# Altium PCB PCB1.PcbDoc
Units mm, origin at the board's own origin, x right, y up, seen from the top; angles counter-clockwise.
Board outline 27.31 x 19.94 mm, 2 copper layers (Top Layer, Bottom Layer); 10 components, 11 nets, 34 pads, 22 vias.
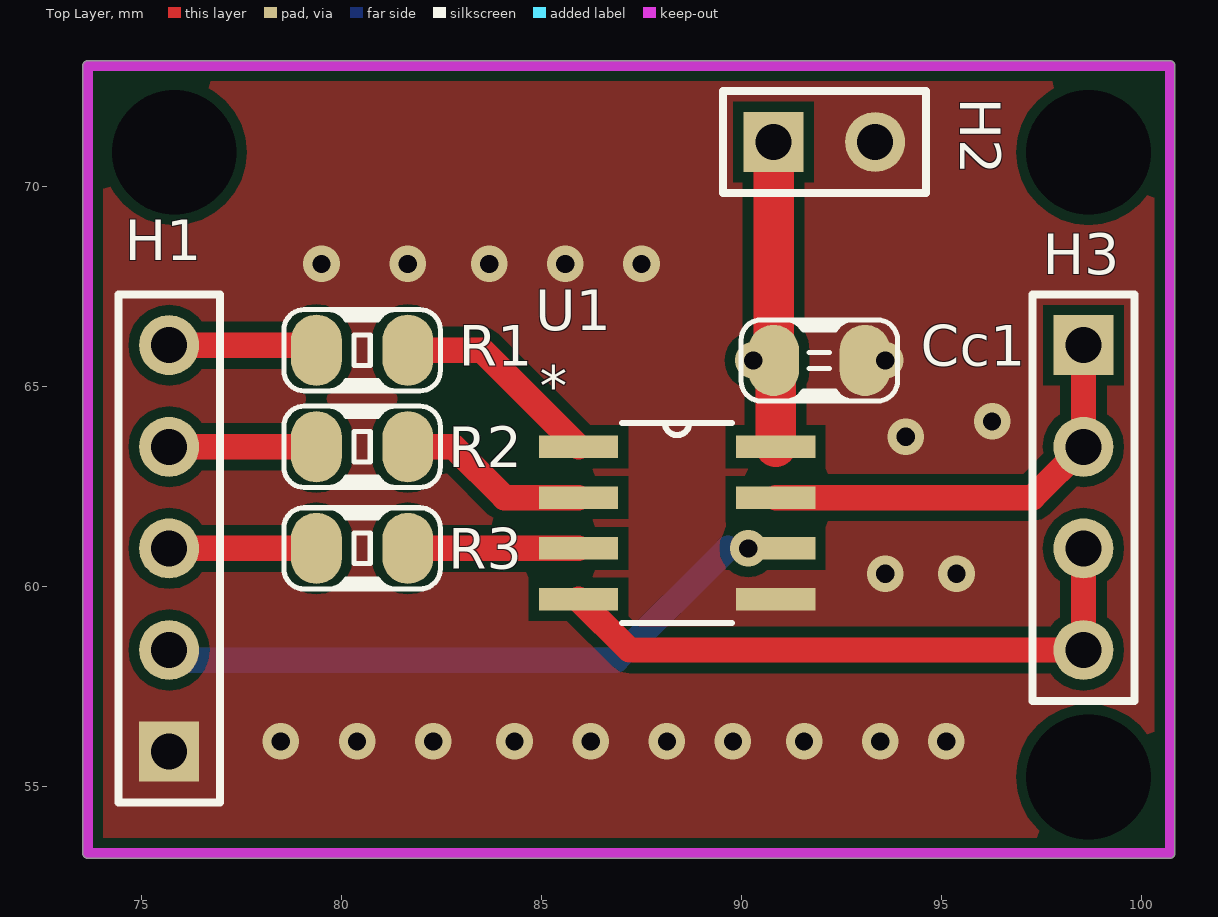
[diagram p0: Top Layer view]
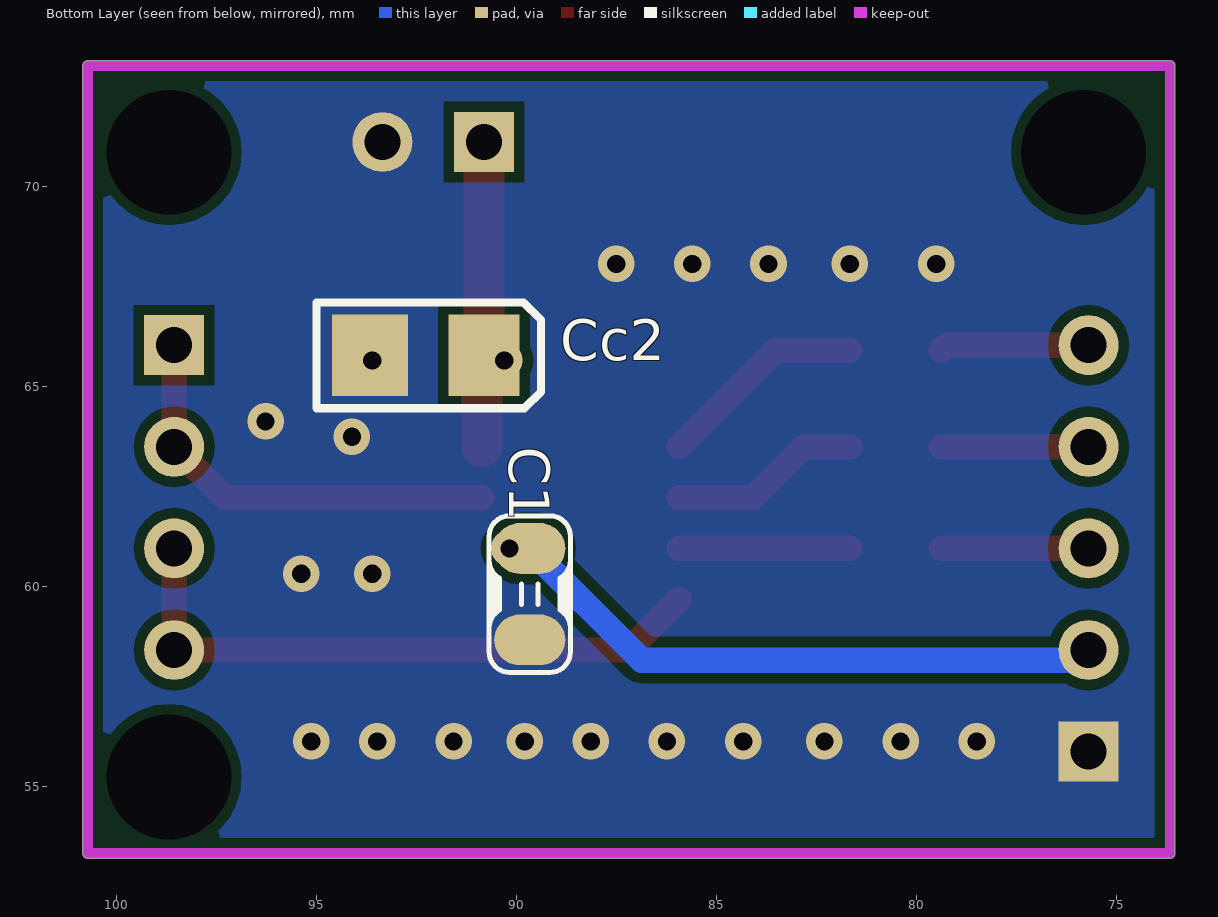
[diagram p1: Bottom Layer view, seen from below]
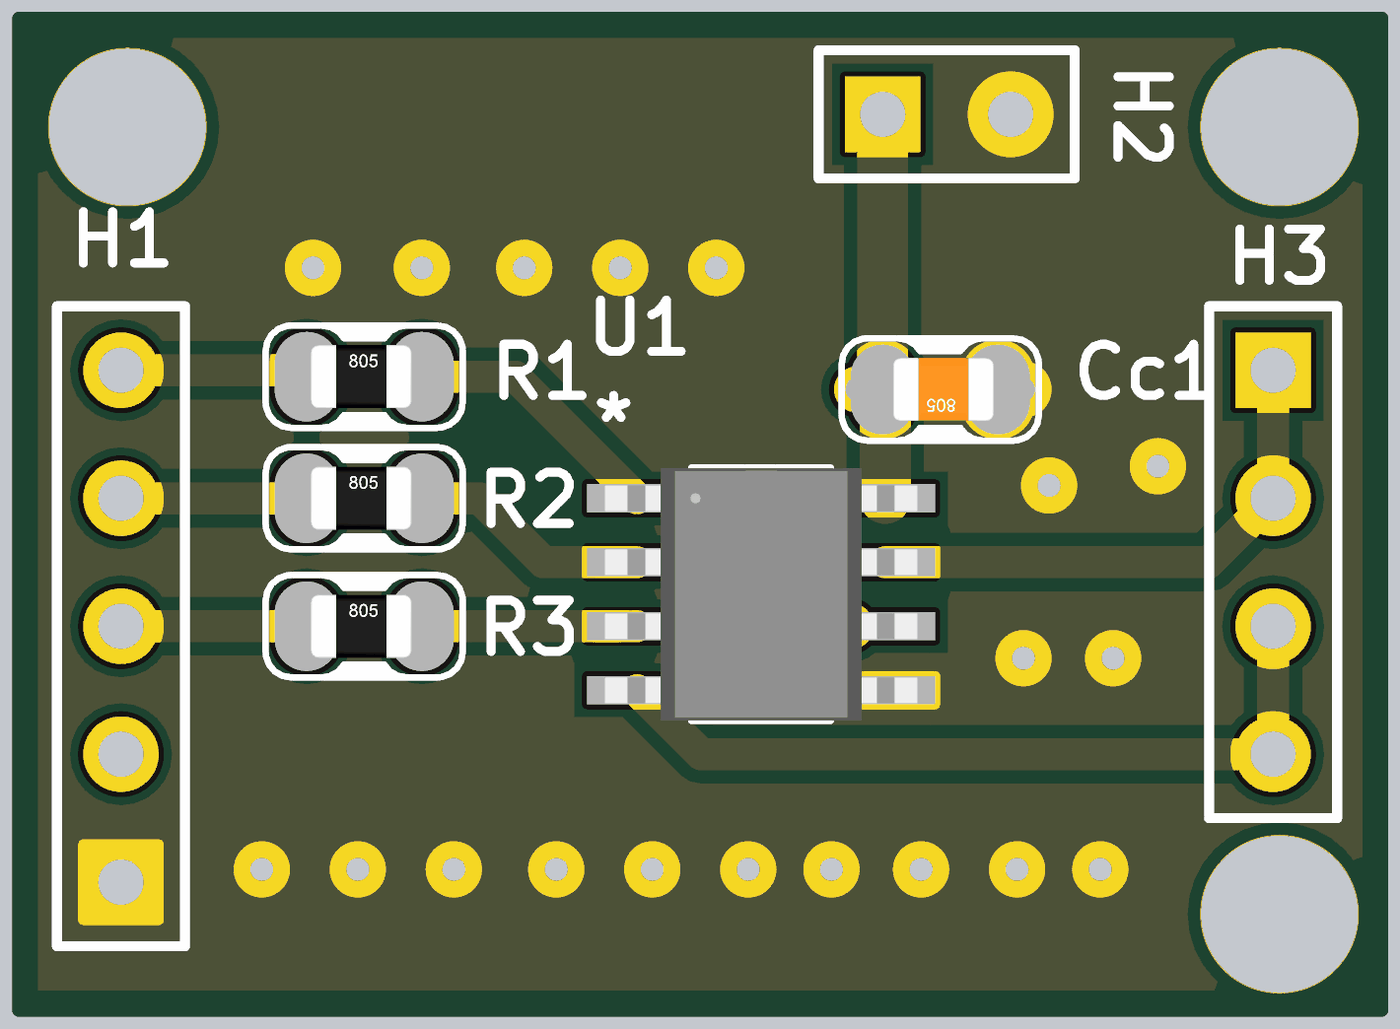
[diagram p2: 3D render of the assembled board from above, using the file's embedded part models]

## Layer stack, top to bottom
Top Solder: solder mask 0.0102, Solder Resist, Dk 3.5
Top Layer: signal copper 0.0356
Dielectric 1: dielectric 0.32, FR-4, Dk 4.8
Bottom Layer: signal copper 0.0356
Bottom Solder: solder mask 0.0102, Solder Resist, Dk 3.5

## Board outline
73.533,53.34 ccw(c73.66,53.34) 73.66,53.213 100.711,53.213 ccw(c100.711,53.34) 100.838,53.34 100.838,73.025 ccw(c100.711,73.025) 100.711,73.152 73.66,73.152 ccw(c73.66,73.025) 73.533,73.025

## Design rules (kind name [scope] priority, off if disabled: settings)
Clearance [All] p1: gap=0.254
PolygonConnect [All] p1: connectstyle=Direct reliefconductorwidth=0.254 reliefentries=4 polygonreliefangle="90 Angle" airgapwidth=0.254
RoutingVias [All] p1: holewidth=0.711 width=1.27 viastyle="Through Hole" minholewidth=0.711 minwidth=1.27 maxholewidth=0.711 maxwidth=1.27
SolderMaskExpansion [All] p1: expansion=0.102
Width [All] p1: maxlimit=2.032 minlimit=0.254 preferedwidth=0.635 minimp=50.000000 maximp=50.000000 favimp=50.000000
30 further rules are at their usual default settings.

## Components (designator, comment, footprint, x,y, rotation, side; value= is the part's Value field where it differs from the comment)
C1 "Cap" 0805C 89.662,60.96 r270 bottom
Cc1 "Cap" 0805C 93.091,65.659 r180 top
Cc2 "Cap2" CAP_SMD_3216 90.805,65.786 r0 bottom
H1 "Header 5" HDR1X5 75.692,55.88 r90 top
H2 "Header 2" HDR1X2 90.805,71.12 r0 top
H3 "Header 4" HDR1X4 98.552,66.04 r270 top
R1 "Rin1" 0805R 79.375,65.913 r0 top
R2 "Rin1" 0805R 79.375,63.5 r0 top
R3 "Rin1" 0805R 79.375,60.96 r0 top
U1 "TLV5617A_D_8" D8 88.392,61.595 r0 top

## Footprints (in the part's own frame and the unit in brackets; to place one, negate y for a bottom-side part, rotate by r counter-clockwise, add the part's x,y. Pads: shape width x height; smd on the part's side, far side on the other; paste and mask are expansions set on the pad)
0805C [mil] "0805封装电容"
  oval 50x70 smd: 1(0,0) 2(90,0)
  silkscreen extent -32,-40 122,40, body extent 3,-25 82,25, height 30
0805R [mil] "0805封装电阻"
  oval 50x70 smd: 1(0,0) 2(90,0)
  silkscreen extent -32,-40 122,40, body extent 3,-25 82,25, height 30
CAP_SMD_3216 [mil] "贴片钽电容，10uF"
  rect 70x80 smd: 1(0,0)
  rect 75x80 smd: 2(112.2,0)
  silkscreen extent -56,-52 165,52, body extent -11,-35 123,35, height 63
D8 [mil]
  rect 78x22 smd: 1(-97,75) 2(-97,25) 3(-97,-25) 4(-97,-75) 5(97,-75) 6(97,-25) 7(97,25) 8(97,75)
  silkscreen extent -54,-98 54,98, body extent -122,-98 122,98, height 69
HDR1X2 [mm] "Connector; Header; 2 Position"
  rect 1.5x1.5 hole 0.9: 1(0,0)
  round 1.5 hole 0.9: 2(2.54,0)
  silkscreen extent -1.27,-1.27 3.81,1.27
HDR1X4 [mm] "Connector; Header; 4 Position"
  rect 1.5x1.5 hole 0.9: 1(0,0)
  round 1.5 hole 0.9: 2(2.54,0) 3(5.08,0) 4(7.62,0)
  silkscreen extent -1.27,-1.27 8.89,1.27
HDR1X5 [mm] "Connector; Header; 5 Position"
  rect 1.5x1.5 hole 0.9: 1(0,0)
  round 1.5 hole 0.9: 2(2.54,0) 3(5.08,0) 4(7.62,0) 5(10.16,0)
  silkscreen extent -1.27,-1.27 11.43,1.27

## Part data
C1 Cc1 Cc2: "Capacitor"
H1: "Header, 5-Pin"
H2: "Header, 2-Pin"
H3: "Header, 4-Pin"
R1 R2 R3: library part Res2, "Resistor"
U1: "Imported"

## Free pads (board coordinates)
  round 1.524 hole 3.12: 2(75.819,70.866) 3(98.679,70.866) 4(98.679,55.245)

## Via types
v1: diameter 0.914, hole 0.457, Top Layer to Bottom Layer, 22 vias

## Nets (pads, with @x,y where several pads share a name; then routed paths per layer and width w, separated by ;. In a path a pad name is that pad's centre, name@x,y a point inside that pad or via, vN(x,y) a via of type N, cw(c..) or ccw(c..) an arc to the next point about the centre after c; other vN are vias at no path point)
GND: C1.2 Cc1.1 Cc2.2 H1.1 H2.2 U1.5
  other v1: 78.486,56.134 80.391,56.134 82.296,56.134 84.328,56.134 86.233,56.134 88.138,56.134 89.789,56.134 91.567,56.134 93.472,56.134 95.123,56.134 93.599,60.325 95.377,60.325 94.107,63.754 96.266,64.135 93.599,65.659 79.502,68.072 81.661,68.072 83.693,68.072 85.598,68.072 87.503,68.072
NetH1_3: H1.3 R3.1 | length 3.7
  Top Layer w0.635: H1.3 R3.1
NetH1_4: H1.4 R2.1 | length 3.7
  Top Layer w0.635: H1.4 R2.1
NetH1_5: H1.5 R1.1 | length 3.7
  Top Layer w0.635: H1.5 79.248,66.04 R1.1
NetR1_2: R1.2 U1.1 | length 5.3
  Top Layer w0.635: R1.2 83.515,65.913 U1.1
NetR2_2: R2.2 U1.2 | length 4.8
  Top Layer w0.635: R2.2 82.804,63.5 84.074,62.23 U1.2
NetR3_2: R3.2 U1.3 | length 4.3
  Top Layer w0.635: R3.2 U1.3
OUTA: H3.3 H3.4 U1.4 | length 15.7
  Top Layer w0.635: U1.4 87.198,58.42 H3.4 H3.3
OUTB: H3.1 H3.2 U1.7 | length 10.8
  Top Layer w0.635: U1.7 97.282,62.23 H3.2 H3.1
REF: C1.1 H1.2 U1.6 | length 15.2
  Bottom Layer w0.254: H1.2 H1.2@75.946,58.166
  Bottom Layer w0.635: H1.2@75.946,58.166 86.868,58.166 C1.1
  other v1: 90.17,60.96
VCC: Cc1.2 Cc2.1 H2.1 U1.8 | length 7.6
  Top Layer w0.635: Cc1.2 Cc1.2@90.856,65.608
  Top Layer w1.016: Cc1.2 H2.1 ; U1.8 Cc1.2@90.856,65.608
  other v1: 90.297,65.659

## Polygon pours and split planes (outlines as drawn)
GND on Top Layer "GND" (solid, pour order 0): 73.66,73.025 100.711,73.025 100.711,53.34 73.66,53.34
GND on Bottom Layer "GND" (solid, pour order 2): 73.66,73.025 100.711,73.025 100.711,53.34 73.66,53.34

## Keep-outs
Keep-Out Layer:
  lines w0.254: 73.66,53.34 73.66,73.025 100.711,73.025 100.711,53.34 73.66,53.34

## Text inside footprints (layer, text, board x,y; h text height)
U1: Top Overlay "*" at 84.963,64.516 h1.02; Mechanical 13 "*" at 84.963,64.516 h1.02